# Altium PCB LSM模块.PcbDoc
Units mil, origin at the board's own origin, x right, y up, seen from the top; angles counter-clockwise.
Board outline 878 x 740 mil, 2 copper layers (Top Layer, Bottom Layer); 8 components, 8 nets, 32 pads, 6 vias.
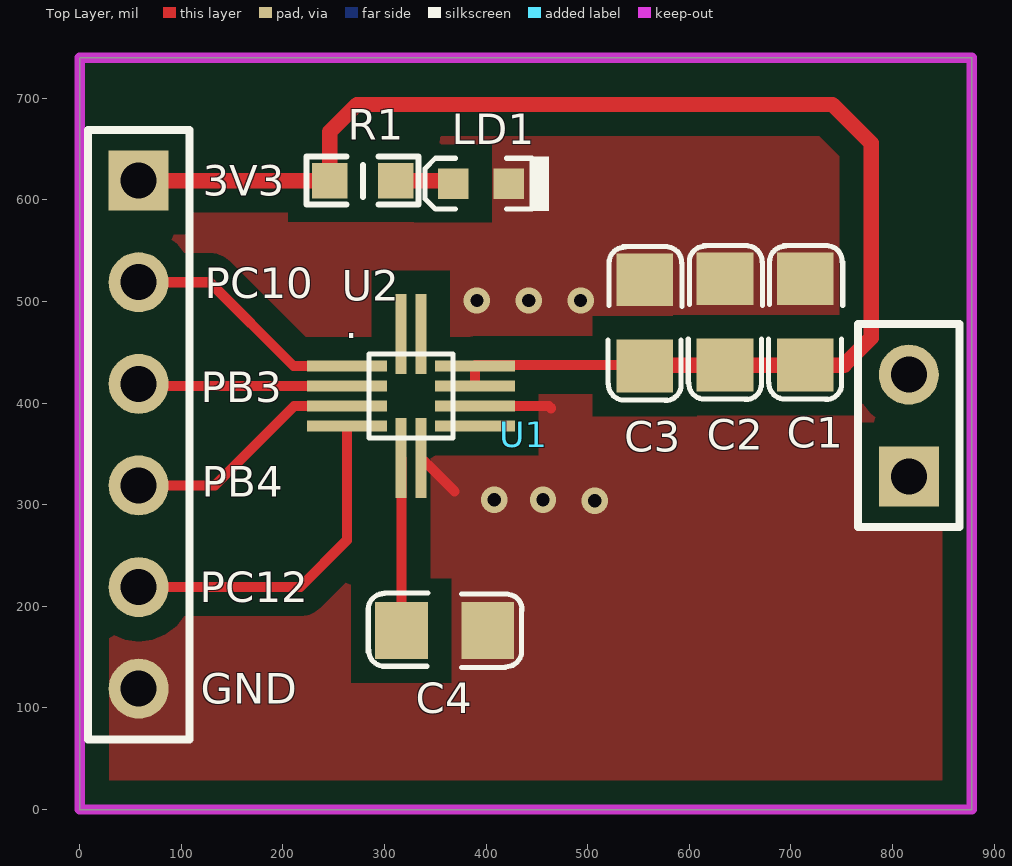
[diagram p0: Top Layer view]
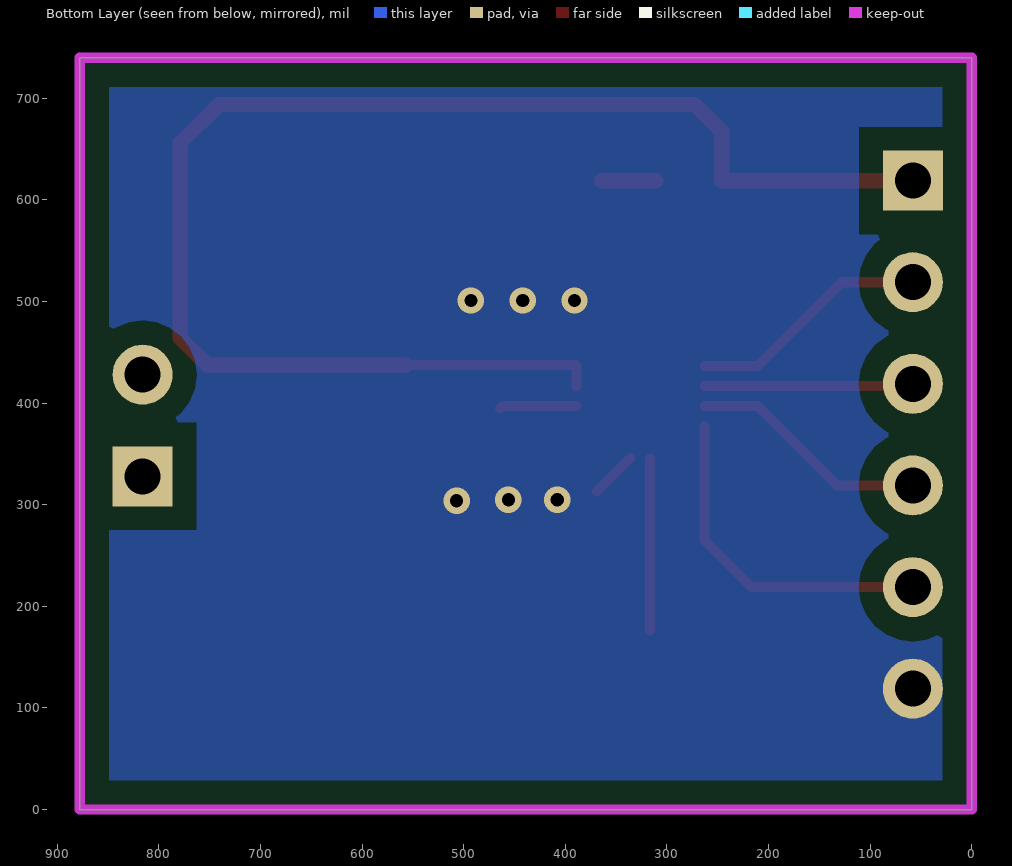
[diagram p1: Bottom Layer view, seen from below]
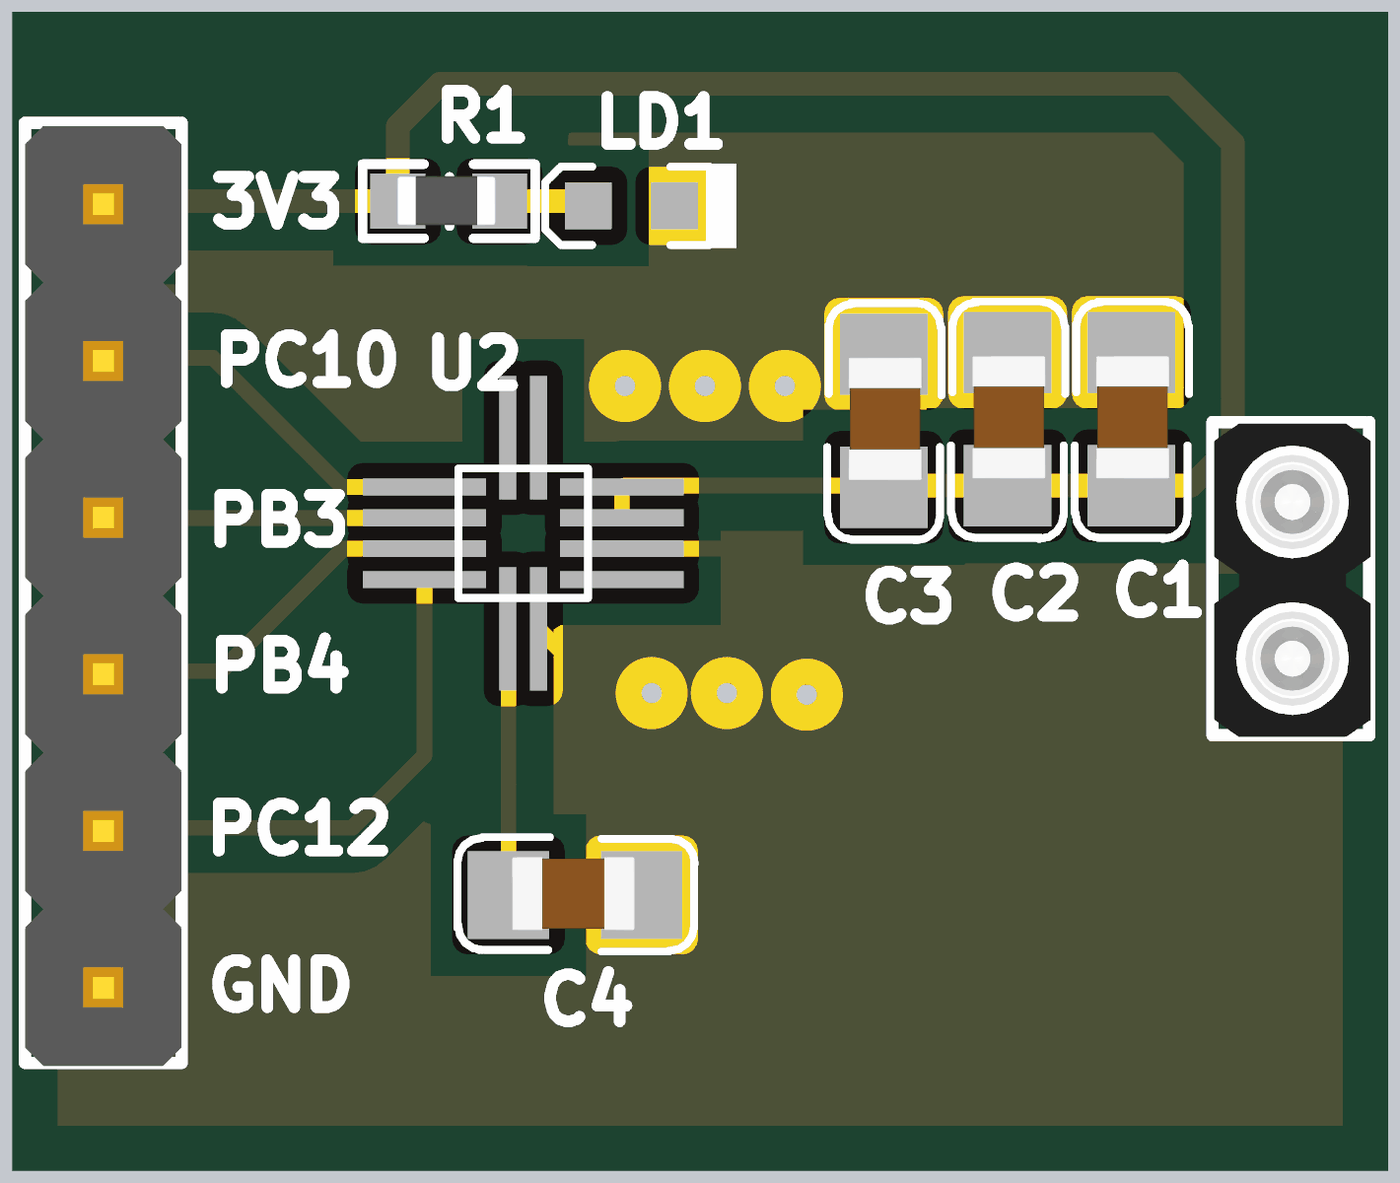
[diagram p2: 3D render of the assembled board from above, using the file's embedded part models]

## Layer stack, top to bottom
Top Solder: solder mask 0.4, Solder Resist, Dk 3.5
Top Layer: signal copper 1.4
Dielectric 1: dielectric 12.6, FR-4, Dk 4.8
Bottom Layer: signal copper 1.4
Bottom Solder: solder mask 0.4, Solder Resist, Dk 3.5

## Board outline
0,0 878,0 878,740 0,740

## Design rules (kind name [scope] priority, off if disabled: settings)
Clearance [All] p1: gap=7
PlaneClearance [All] p1: clearance=24
PlaneConnect [All] p1: planeconnectstyle=Direct reliefexpansion=20 reliefentries=4 reliefconductorwidth=10 reliefairgap=10
PolygonConnect [All] p1: connectstyle=Direct reliefconductorwidth=10 reliefentries=4 polygonreliefangle="90 Angle" airgapwidth=10
RoutingVias [All] p1: holewidth=28 width=50 viastyle="Through Hole" minholewidth=28 minwidth=50 maxholewidth=28 maxwidth=50
SolderMaskExpansion [All] p1: expansion=10
UnpouredPolygon [All] p1: allowunpoured=FALSE
Width [All] p1: maxlimit=60 minlimit=10 preferedwidth=10
27 further rules are at their usual default settings.

## Components (designator, comment, footprint, x,y, rotation, side; value= is the part's Value field where it differs from the comment)
C1 "104" C-0805c 753,558 r270 top
C2 "104" C-0805c 674,558 r270 top
C3 "106" C-0805C 595,557 r270 top
C4 "220nf" C-0805C 281,215 r0 top
LD1 "" D-0603D 395,616 r90 top
R1 "510R" R-0603R 221,644 r0 top
U1 "J-6PIN" LSM底座 208,337 r0 top
U2 "LSM303AGR" LSM电子罗盘 326,407 r0 top

## Footprints (in the part's own frame and the unit in brackets; to place one, negate y for a bottom-side part, rotate by r counter-clockwise, add the part's x,y. Pads: shape width x height; smd on the part's side, far side on the other; paste and mask are expansions set on the pad)
C-0805c [mil]
  rect 52x56 smd: 1(35.6,-38.84) 2(120.6,-38.84)
  silkscreen extent 3,-75 155,-2, body extent 38,-62 116,-14, height 37
C-0805C [mil]
  rect 52x56 smd: 1(35.6,-38.84) 2(120.6,-38.84)
  silkscreen extent 3,-75 155,-2, body extent 38,-62 116,-14, height 37
D-0603D [mil]
  rect 30x30 smd: 1(0,27.5) 2(0,-27.5)
  silkscreen extent -27,-67 27,55, body extent -15,-39 15,38, height 12
LSM底座 [mm]
  rect 1.5x1.5 hole 0.9: 1(-3.81,7.163) 8(15.443,-0.229)
  round 1.5 hole 0.9: 2(-3.81,4.623) 3(-3.81,2.083) 4(-3.81,-0.457) 5(-3.81,-2.997) 6(-3.81,-5.537) 7(15.443,2.311)
  silkscreen extent -5.08,-6.81 16.71,8.43, body extent -5.08,-6.86 16.74,8.38, height 10.1
LSM电子罗盘 [mm]
  rect 2x0.275 smd: 1(-1.6,0.75) 2(-1.6,0.25) 3(-1.6,-0.25) 4(-1.6,-0.75) 7(1.6,-0.75) 8(1.6,-0.25) 9(1.6,0.25) 10(1.6,0.75)
  rect 0.275x2 smd: 5(-0.25,-1.55) 6(0.25,-1.55) 11(0.25,1.55) 12(-0.25,1.55)
  silkscreen extent -1.05,-1.05 1.05,1.05
R-0603R [mil]
  rect 35x35 smd: 1(25,-25) 2(90,-25)
  silkscreen extent 2,-49 113,-1, body extent 25,-40 87,-9, height 15

## Part data
C1 C2 C3 C4: library part Cap, "Capacitor"
LD1: library part LED
R1: library part Resistor, "RES, 10K, 5%, 0.1 W, 0603"
U2: "e-compass"

## Via types
v1: diameter 26, hole 13, Top Layer to Bottom Layer, 6 vias

## Nets (pads, with @x,y where several pads share a name; then routed paths per layer and width w, separated by ;. In a path a pad name is that pad's centre, name@x,y a point inside that pad or via, vN(x,y) a via of type N, cw(c..) or ccw(c..) an arc to the next point about the centre after c; other vN are vias at no path point)
3V3: C1.2 C2.2 C3.2 R1.1 U1.1 U2.9 U2.10 | length 1407.8
  Top Layer w10: U2.9 U2.10 ; U2.10@389.86,437.4 C3.2@557.16,437.4
  Top Layer w15: U1.1 R1.1 246,667 273,694 741,694 779,656 779,464 752.4,437.4 C1.2 C2.2 C3.2@557.16,437.4
GND: C1.1 C2.1 C3.1 C4.2 LD1.2 U1.6 U2.6 U2.8 | length 122.7
  Top Layer w10: U2.6 336.02,345.98 369,313 ; U2.8 461.84,397.16 464,395
  other v1: 507,304 408,305 456,305 391,501 442,501 493,501
NetC4_1: C4.1 U2.5 | length 169.4
  Top Layer w10: C4.1 U2.5@316.6,345.53
NetLD1_1: LD1.1 R1.2 | length 53.5
  Top Layer w15: R1.2 LD1.1@364.5,619
PB3: U1.3 U2.2 | length 202.9
  Top Layer w10: U1.3@60.16,416.84 U2.2
PB4: U1.4 U2.3 | length 237.4
  Top Layer w10: U1.4 133,319 211.16,397.16 U2.3
PC10: U1.2 U2.1 | length 239.2
  Top Layer w10: U1.2 128,519 210.47,436.53 U2.1
PC12: U1.5 U2.4 | length 336.5
  Top Layer w10: U1.5 217,219 263,265 U2.4
pads on no net: U1.7 U1.8 U2.7 U2.11 U2.12

## Polygon pours and split planes (outlines as drawn)
GND on Top Layer "Bottom Layer-No Net" (solid, remove dead copper, pour order 4): 0,740 878,740 878,0 0,0
GND on Bottom Layer "Bottom Layer-No Net" (solid, remove dead copper, pour order 8): 0,740 878,740 878,0 0,0

## Keep-outs
Keep-Out Layer:
  the board outline again, w10

## Silkscreen, mask and mechanical layers (free items; w line width, h text height)
Top Overlay:
  text "3V3" at 121,604 h30
  text "PC10" at 123,503 h30
  text "PB3" at 119,401 h30
  text "PB4" at 120,308 h30
  text "PC12" at 118,204 h30
  text "GND" at 119,104 h30